# Altium PCB RFM22.PcbDoc
Units mil, origin at the board's own origin, x right, y up, seen from the top; angles counter-clockwise.
Board outline 1190 x 1895 mil, 2 copper layers (Top Layer, Bottom Layer); 34 components, 37 nets, 131 pads, 18 vias.
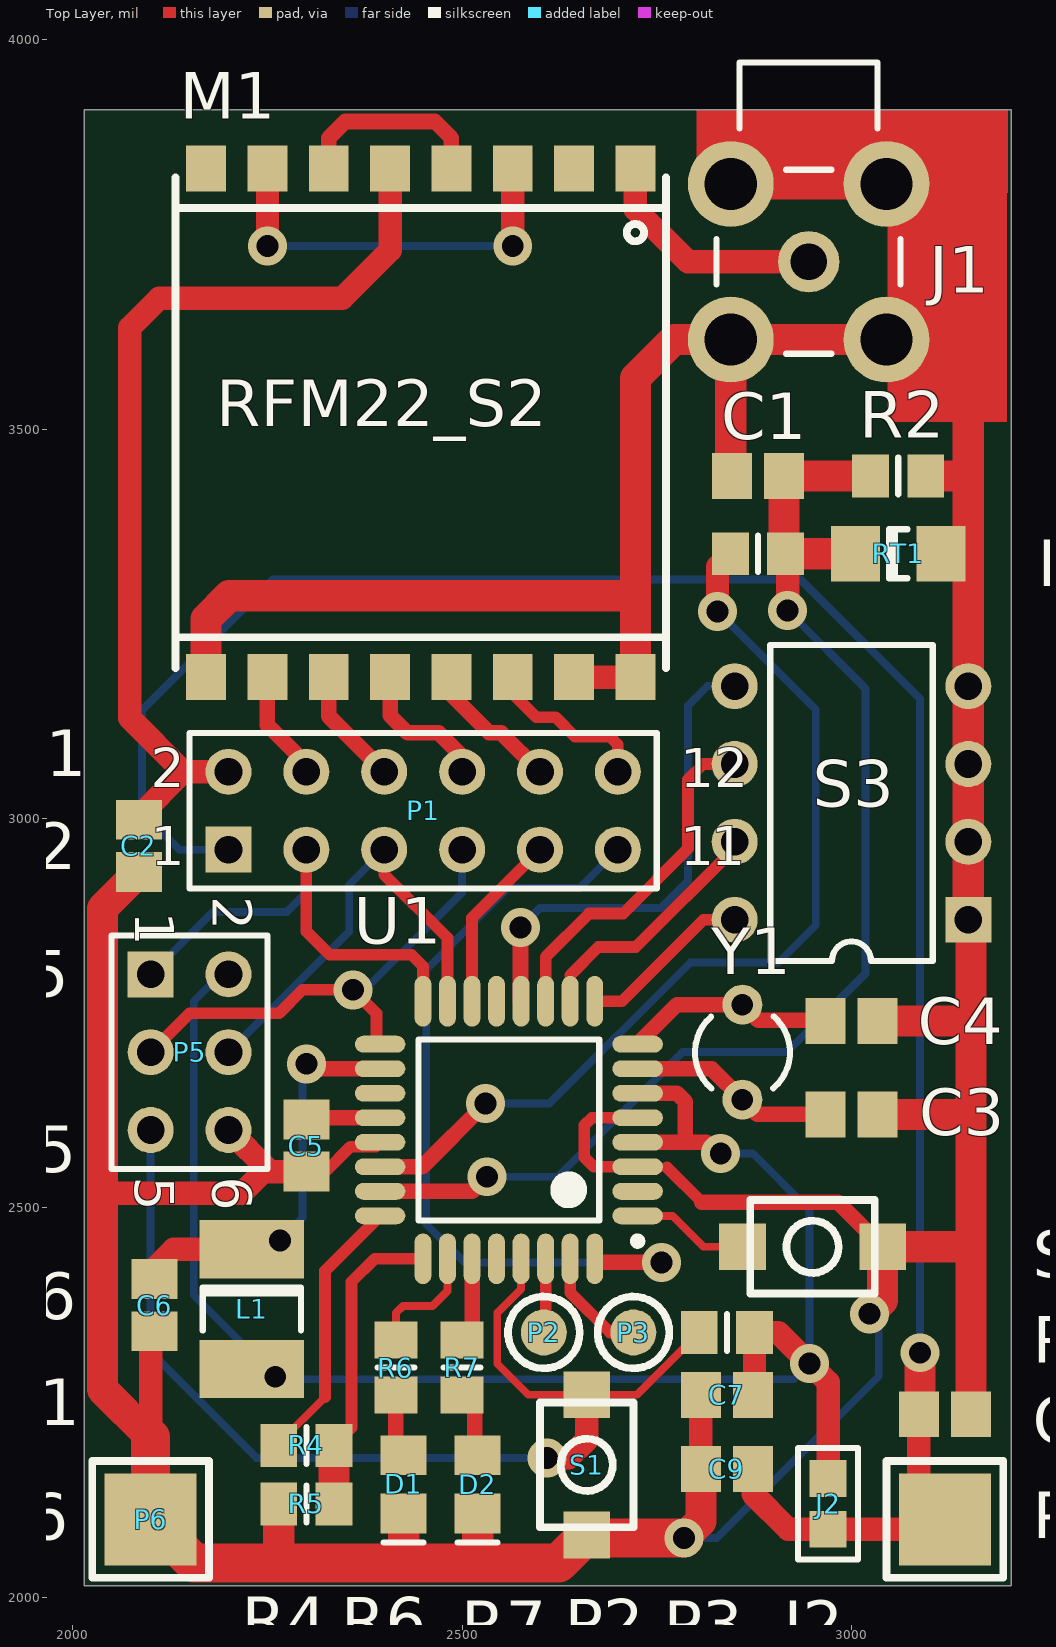
[diagram p0: Top Layer view]
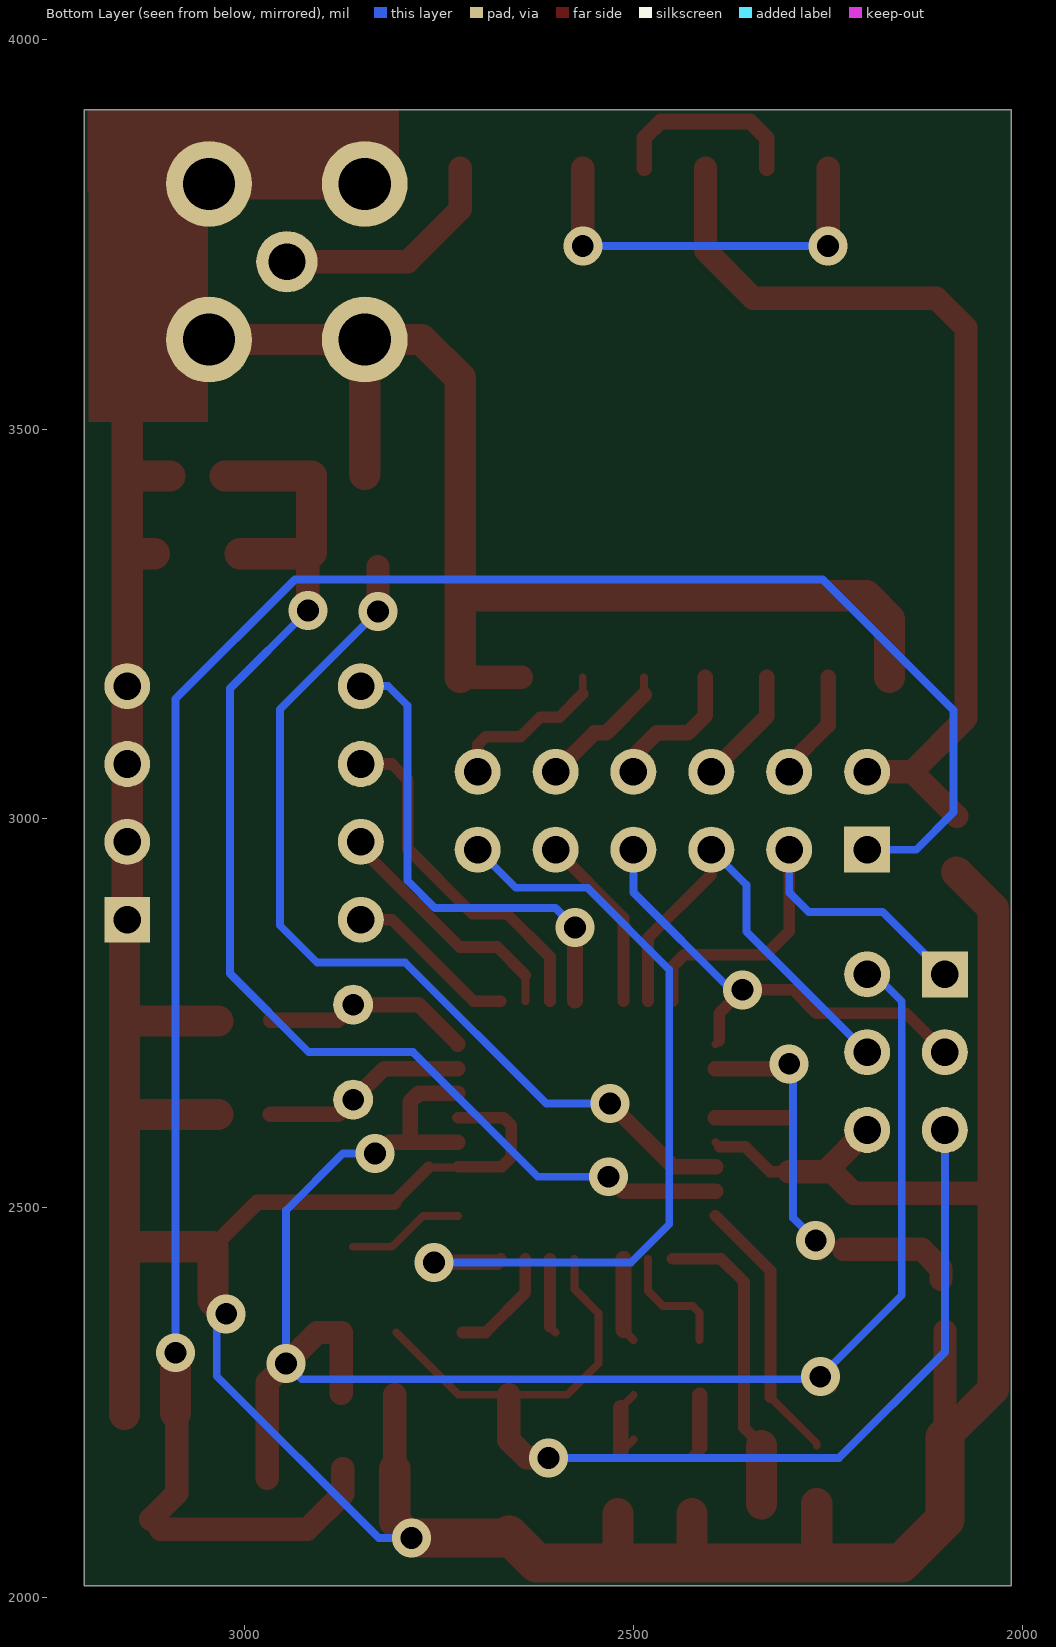
[diagram p1: Bottom Layer view, seen from below]

## Layer stack, top to bottom
Top Layer: signal copper 1.4
Dielectric: dielectric 12.6, FR-4, Dk 4.8
Bottom Layer: signal copper 1.4

## Board outline
2015,2015 3205,2015 3205,3910 2015,3910

## Design rules (kind name [scope] priority, off if disabled: settings)
Clearance [All] p1: gap=10
PolygonConnect [All] p1: connectstyle=Relief reliefconductorwidth=10 reliefentries=4 polygonreliefangle="90 Angle"
RoutingVias [All] p1: holewidth=28 width=50 viastyle="Through Hole" minholewidth=28 minwidth=50 maxholewidth=28 maxwidth=50
SilkscreenOverComponentPads [All] p1: minsilkscreentomaskgap=10
SolderMaskExpansion [All] p1: expansion=4
TestPointUsage FabricationTestPointUsage [All] p1: valid=0 allowmultiple=FALSE
Testpoint FabricationTestpoint [(IsPad And (OnTopLayer Or OnBottomLayer))] p1: side=3 testpointundercomponent=TRUE minsize=40 maxsize=100 preferedsize=60 minholesize=0 maxholesize=40 preferedholesize=32 testpointgrid=1 style=297 order=0-112345678
Width [All] p1: maxlimit=10 minlimit=10 preferedwidth=10
23 further rules are at their usual default settings.

## Components (designator, comment, footprint, x,y, rotation, side; value= is the part's Value field where it differs from the comment)
C1 "10 nF" C0805 2880,3440 r0 top
C2 "0.1 uF" C0805 2085,2965 r270 top
C3 "22 pF" C0805 3000,2620 r180 top
C4 "22 pF" C0805 3000,2740 r180 top
C5 "0.1 uF" C0805 2300,2580 r90 top
C6 "0.1 uF" C0805 2105,2375 r90 top
C7 "0.1 uF" C0805 2840,2260 r0 top
C8 "10 uF" C0805 3120,2235 r180 top
C9 "10 uF" C0805 2840,2165 r0 top
D1 "LED_SMD" LED-0805 2425,2145 r270 top
D2 "LED_SMD" LED-0805 2520,2145 r270 top
J1 "919-119J-51AX" 919-119J 2945,3715 r270 top
J2 "SMD jumper" "SMD jmp 2" 2970,2120 r270 top
L1 "10 mH" 1812 2230,2370 r270 top
M1 "RFM22" RFM22_S2 2722.48,3835 r270 top
P1 "Header 6X2" HDR2X6 2200,2960 r0 top
P2 "PAD1" PAD1 2605,2340 r0 top
P3 "PAD1" PAD1 2720,2340 r0 top
P4 "PAD_PWR" PAD_PWR 3120,2100 r0 top
P5 "Header 3X2" HDR2X3 2100,2800 r270 top
P6 "PAD_PWR" PAD_PWR 2100,2100 r0 top
R1 "10 K" R0805 2880,3340 r180 top
R2 "10 K" R0805 3060,3440 r0 top
R3 "10 K" R0805 2840,2340 r180 top
R4 "10 K" R0805 2300,2195 r180 top
R5 "10 K" R0805 2300,2120 r0 top
R6 "10 K" R0805 2415,2295 r270 top
R7 "10 K" R0805 2500,2295 r270 top
RT1 "NTC 10K" R1206 3060,3340 r0 top
S1 "SW-PB" SW_ts017a 2770,2240 r90 top
S2 "SW-PB" SW_ts017a 2880,2560 r180 top
S3 "SW DIP-4" DIP-8 3000,3020 r90 top
U1 "ATmega8L-8AC" 32A_N 2560,2600 r180 top
Y1 "XTAL" X32768_normal 2860,2700 r0 top

## Footprints (in the part's own frame and the unit in brackets; to place one, negate y for a bottom-side part, rotate by r counter-clockwise, add the part's x,y. Pads: shape width x height; smd on the part's side, far side on the other; paste and mask are expansions set on the pad)
32A_N [mm] "Thin QFP, 32-Leads, Body 7x7mm, Pitch 0.8mm, IPC Medium Density"
  oval 1.65x0.55 smd: 1(-4.2,2.8) 2(-4.2,2) 3(-4.2,1.2) 4(-4.2,0.4) 5(-4.2,-0.4) 6(-4.2,-1.2) 7(-4.2,-2) 8(-4.2,-2.8) 17(4.2,-2.8) 18(4.2,-2) 19(4.2,-1.2) 20(4.2,-0.4) 21(4.2,0.4) 22(4.2,1.2) 23(4.2,2) 24(4.2,2.8)
  oval 0.55x1.65 smd: 9(-2.8,-4.2) 10(-2,-4.2) 11(-1.2,-4.2) 12(-0.4,-4.2) 13(0.4,-4.2) 14(1.2,-4.2) 15(2,-4.2) 16(2.8,-4.2) 25(2.8,4.2) 26(2,4.2) 27(1.2,4.2) 28(0.4,4.2) 29(-0.4,4.2) 30(-1.2,4.2) 31(-2,4.2) 32(-2.8,4.2)
  silkscreen extent -4.33,-2.95 2.95,3.75, body extent -3.5,-3.5 3.5,3.5, height 1.2
919-119J [mm] "Connector; RF Coaxial, MCX, Thru-Hole; 5 Position; Right Angle"
  round 2 hole 1.2: 1(0,0)
  round 2.8 hole 1.7: 2(-2.54,-2.54) 3(2.54,-2.54) 4(2.54,2.54) 5(-2.54,2.54)
  silkscreen extent -6.5,-3 3,3
1812 [mm] "Chip; Body 4.5 x 3.2 mm (LxW typ)"
  rect 1.9x3.4 smd: 1(-1.95,0) 2(1.95,0)
  silkscreen extent -0.7,-1.6 0.7,1.6
C0805 [mm] "Chip Capacitor, Body 2.0x1.3mm, IPC Medium Density"
  rect 1.3x1.5 smd: 1(-0.85,0) 2(0.85,0)
  body extent -1.1,-0.72 1.1,0.72, height 1.1
DIP-8 [mm] "DIP; 8 Leads; Row Spacing 7.62 mm; Pitch 2.54 mm"
  rect 1.5x1.5 hole 0.9: 1(-3.81,-3.81)
  round 1.5 hole 0.9: 2(-1.27,-3.81) 3(1.27,-3.81) 4(3.81,-3.81) 5(3.81,3.81) 6(1.27,3.81) 7(-1.27,3.81) 8(-3.81,3.81)
  silkscreen extent -5.15,-2.65 5.15,2.65
HDR2X3 [mm] "Connector; Header; 3x2 Position"
  rect 1.5x1.5 hole 0.9: 1(0,0)
  round 1.5 hole 0.9: 2(0,2.54) 3(2.54,0) 4(2.54,2.54) 5(5.08,0) 6(5.08,2.54)
  silkscreen extent -1.27,-1.27 6.35,3.81
HDR2X6 [mm] "Connector; Header; 6x2 Position"
  rect 1.5x1.5 hole 0.9: 1(0,0)
  round 1.5 hole 0.9: 2(0,2.54) 3(2.54,0) 4(2.54,2.54) 5(5.08,0) 6(5.08,2.54) 7(7.62,0) 8(7.62,2.54) 9(10.16,0) 10(10.16,2.54) 11(12.7,0) 12(12.7,2.54)
  silkscreen extent -1.27,-1.27 13.97,3.81
LED-0805 [mm] "Chip Diode; Body 2.0 x 1.3 mm (LxW typ)"
  rect 1.3x1.5 smd: 1(-0.95,0) 2(0.95,0)
  silkscreen extent 1.9,-0.65 1.9,0.65
PAD1 [mm] "Connector"
  round 1.5 smd: 1(0,0)
  silkscreen extent -1.17,-1.17 1.17,1.17
PAD_PWR [mm] "Connector"
  rect 3x3 smd: 1(0,0)
  silkscreen extent -1.91,-1.91 1.91,1.91
R0805 [mm] "Chip Resistor, Body 2.0x1.3mm, IPC Medium Density"
  rect 1.2x1.4 smd: 1(-0.9,0) 2(0.9,0)
  silkscreen extent 0,-0.6 0,0.6, body extent -1.07,-0.7 1.07,0.7, height 0.65
R1206 [mm] "Chip Resistor; Body 3.2 x 1.6 mm (LxW typ)"
  rect 1.6x1.8 smd: 1(-1.4,0) 2(1.4,0)
  silkscreen extent -0.3,-0.8 0.3,0.8
RFM22_S2 [mm]
  rect 1.5x1.3 smd: 1(0,0) 2(0,-2) 3(0,-4) 4(0,-6) 5(0,-8) 6(0,-10) 7(0,-12) 8(0,-14) 9(16.6,-14) 10(16.6,-12) 11(16.6,-10) 12(16.6,-8) 13(16.6,-6) 14(16.6,-4) 15(16.6,-2) 16(16.6,0)
  silkscreen extent 0.3,-15 16.3,1
"SMD jmp 2" [mm]
  rect 1.2x1.2 smd: 1(-0.83,0) 2(0.83,0)
  silkscreen extent -1.82,-0.98 1.82,0.98
SW_ts017a [mil]
  rect 60x60 smd: 1(-160,110) 2(20,110)
  silkscreen extent -150,50 10,170
X32768_normal [mm] "Crystal, Thru-Hole; 2 Leads; Body 3.1 x 8.2 mm (Dia.xH)"
  round 1.3 hole 0.7: 1(0,1.55) 2(0,-1.55)
  silkscreen extent -1.55,-1.19 1.55,1.17

## Part data
C1 C2 C3 C4 C5 C6 C7 C8 C9: library part Cap, "Capacitor"
D1 D2: "Typical SMD LED"
J1: "MCX RF Coaxial PCB Connector, Thru-Hole, Right-Angle Mount Socket, Blunt Post Terminal, 50 Ohm Impedance"
L1: library part Inductor, "Inductor"
P1: "Header, 6-Pin, Dual row"
P2: library part PAD_PWR, "PAD connection"
P3 P4 P6: "PAD connection"
P5: "Header, 3-Pin, Dual row"
R1 R2 R3 R4 R5 R6 R7: library part Res1, "Resistor"
RT1: library part "Res Thermal", "Thermistor"
S1 S2: "Switch"
S3: "DIP Switch, 4 Position, SPST"
U1: "8-Bit AVR Microcontroller with 8K Bytes of In-System Programmable Flash Memory"
Y1: "Crystal Oscillator"

## Via types
v1: diameter 50, hole 28, Top Layer to Bottom Layer, 18 vias

## Nets (pads, with @x,y where several pads share a name; then routed paths per layer and width w, separated by ;. In a path a pad name is that pad's centre, name@x,y a point inside that pad or via, vN(x,y) a via of type N, cw(c..) or ccw(c..) an arc to the next point about the centre after c; other vN are vias at no path point)
GLED: R7.1 U1.27 | length 109.5
  Top Layer w10: R7.1 R7.1@2512.76,2343.19
  Top Layer w20: R7.1@2512.76,2343.19 U1.27
GND: C1.1 C2.2 C3.1 C4.1 C5.1 C6.1 C7.1 C8.1 C9.1 D1.2 D2.2 J1.2 J1.3 J1.4 J1.5 M1.9 M1.15 M1.16 P5.6 P6.1 R2.2 R5.1 RT1.2 S1.1 S2.1 S3.1 S3.2 S3.3 S3.4 U1.3 U1.5 U1.21 | length 7685.3
  Top Layer w10: 2038,2520 2039,2519 ; 2244.54,2546.54 2253.46,2546.54 ; U1.21@2388.98,2578.58 U1.21 ; 2520,2045 2521,2044 ; U1.3 2726.11,2552 2763,2552 ; C1.1@2845,3441.54 C1.1 ; C4.1 C4.1@3035.46,2738 ; S3.1 S3.1@3153.46,2866.54
  Top Layer w15: C5.1 2324.54,2546.54 2356.58,2578.58 U1.21@2388.98,2578.58 ; U1.3 2669.24,2552.76 2657,2565 2657,2606 2666.75,2615.75 U1.5 ; 2763,2552 2808,2507
  Top Layer w20: 2808,2507 2983,2507 S2.1
  Top Layer w30: 2039,2519 2217,2519 2244.54,2546.54 ; 2100,2205 C6.1@2100,2341.54 ; P5.6 2253.46,2546.54 C5.1 ; M1.15 M1.16 ; C9.1 C7.1
  Top Layer w40: C2.2 2038,2884.54 2038,2520 2038,2267 2100,2205 ; M1.9 2171.3,3256.3 2201,3286 2722.48,3286 ; 2264.57,2046.57 R5.1 ; 2425,2044 D1.2 ; 2520,2045 D2.2 ; M1.16 2722.48,3286 ; v1(2785,2076) 2806.54,2097.54 C9.1 ; C1.1@2845,3441.54 J1.3 ; J1.2 J1.5 3123,3815 3150,3788 3150,3615 ; v1(3023,2364) 3040,2381 S2.1 3153.46,2450 ; C3.1 3153.46,2620 ; C4.1 3153.46,2740 ; R2.2 3150,3440 ; RT1.2 3150,3340 ; S3.1 S3.2 S3.3 S3.4 3150,3340 ; C8.1 3153.46,2450 ; S3.1@3153.46,2866.54 3153.46,2740 ; 2722.48,3286 2722.48,3565.48 2772,3615 J1.3 ; J1.3 J1.4 3150,3615 ; 3150,3340 3150,3615 ; 3153.46,2450 3153.46,2620 ; 3153.46,2620 3153.46,2740
  Top Layer w50: 2100,2205 P6.1 2156,2044 2425,2044 2521,2044 2624,2044 S1.1 ; S1.1@2664,2076 v1(2785,2076)
  Bottom Layer w10: v1(2785,2076) 2827,2076 3035,2284 3035,2352 v1(3023,2364)
NetC1_2: C1.2 R1.1 R2.1 RT1.1 U1.23 | length 1618.4
  Top Layer w10: R1.1@2913.46,3341.97 R1.1
  Top Layer w20: U1.23 2513.26,2521.26 v1(2532,2540)
  Top Layer w30: v1(2918,3267) R1.1@2918,3337.43
  Top Layer w40: R1.1@2913.46,3341.97 C1.2 R2.1 ; R1.1 RT1.1
  Bottom Layer w10: v1(2532,2540) 2623,2540 2783,2700 2917,2700 3018,2801 3018,3167 v1(2918,3267)
NetC2_1: C2.1 M1.5 P1.2 | length 1222.9
  Top Layer w10: C2.1 C2.1@2085,3003
  Top Layer w30: C2.1@2085,3003 2142,3060 ; P1.2 2142,3060 ; M1.5 2407.52,3729.52 2346,3668 2111,3668 2073,3630 2073,3129 2142,3060
NetC3_2: C3.2 U1.7 Y1.2 | length 267
  Top Layer w10: C3.2@2965.51,2618.98 C3.2
  Top Layer w20: U1.7 2820.24,2678.74 Y1.2 2878.98,2620 C3.2
NetC4_2: C4.2 U1.8 Y1.1 | length 270.9
  Top Layer w10: C4.2@2965.51,2741.02 C4.2
  Top Layer w20: U1.8 2776.14,2761.02 Y1.1 2880,2741.02 C4.2@2965.51,2741.02
NetC5_2: C5.2 U1.20 | length 95.6
  Top Layer w10: C5.2 C5.2@2302.28,2615.75
  Top Layer w20: C5.2@2302.28,2615.75 U1.20
NetC6_2: C6.2 L1.1 U1.18 | length 501.6
  Top Layer w10: L1.1@2249.77,2447 L1.1@2260,2436.77 ; v1(2300,2685) v1@2306.26,2678.74
  Top Layer w20: v1@2306.26,2678.74 U1.18
  Top Layer w30: C6.2 2105,2422 2129.77,2446.77 L1.1
  Bottom Layer w10: v1(2266,2458) 2295,2487 2295,2680 v1(2300,2685)
NetD1_1: D1.1 R6.2 | length 88.4
  Top Layer w10: D1.1@2415,2192.4 D1.1 D1.1@2420,2187.4
  Top Layer w20: D1.1@2415,2192.4 R6.2
NetD2_1: D2.1 R7.2 | length 113.7
  Top Layer w10: D2.1@2500,2202.4 D2.1 D2.1@2516.2,2186.2 ; R7.2 R7.2@2516.2,2243.37
  Top Layer w20: D2.1@2516.2,2186.2 R7.2@2516.2,2243.37
NetJ1_1: J1.1 M1.1 | length 303
  Top Layer w30: M1.1 2722.48,3782.52 2790,3715 J1.1
NetM1_3: M1.3 M1.7 | length 515
  Top Layer w30: v1(2250,3735) M1.7 ; v1(2565,3735) M1.3
  Bottom Layer w10: v1(2250,3735) v1(2565,3735)
NetM1_4: M1.4 M1.6 | length 252.6
  Top Layer w20: M1.6 2328.78,3873.78 2350,3895 2465,3895 2486.26,3873.74 M1.4
NetM1_10: M1.10 P1.4 | length 142.2
  Top Layer w10: P1.4 P1.4@2300,3070
  Top Layer w20: M1.10 2250.04,3119.96 P1.4@2300,3070
NetM1_11: M1.11 P1.6 | length 151
  Top Layer w20: M1.11 2328.78,3131.22 P1.6
NetM1_12: M1.12 P1.8 | length 183.2
  Top Layer w10: P1.8 P1.8@2500,3080
  Top Layer w20: M1.12 2407.52,3132.48 2430,3110 2470,3110 P1.8@2500,3080
NetM1_13: M1.13 P1.10 | length 177.4
  Top Layer w10: M1.13@2486.26,3158.74 M1.13
  Top Layer w20: M1.13@2486.26,3158.74 2535,3110 2550,3110 P1.10
NetM1_14: M1.14 P1.12 | length 218.4
  Top Layer w10: M1.14@2565,3160 M1.14
  Top Layer w15: M1.14@2565,3160 2595,3130 2620,3130 2645,3105 2690,3105 2700,3095 P1.12
NetP2_1: P2.1 U1.30 | length 97.6
  Top Layer w10: P2.1@2600,2340 P2.1@2607.24,2347.24
  Top Layer w15: P2.1@2607.24,2347.24 U1.30
NetP3_1: P3.1 U1.31 | length 145.9
  Top Layer w15: U1.31 2638.74,2391.26 2690,2340 P3.1
NetR1_2: R1.2 U1.22 | length 1200.5
  Top Layer w20: U1.22 2448.76,2552.76 v1(2530,2634)
  Top Layer w30: v1(2828,3266) R1.2@2828,3323.43
  Bottom Layer w10: v1(2530,2634) 2612,2634 2793,2815 2906,2815 2954,2863 2954,3140 v1(2828,3266)
NetR4_1: R4.1 R5.2 U1.25 | length 398.4
  Top Layer w15: R4.1 2358,2217.57 2358,2405 2387.65,2434.65 U1.25
  Top Layer w40: R5.2 R4.1
NetR4_2: R4.2 U1.24 | length 352.5
  Top Layer w10: R4.2 2264.57,2197.57 2324,2257 ; U1.24@2390.76,2489.76 U1.24
  Top Layer w15: 2324,2257 2324,2419.12 U1.24
NetS2_2: S2.2 U1.1 | length 151.1
  Top Layer w10: U1.1 2770.24,2489.76 2810,2450 S2.2
NIRQ: P1.11 U1.32 | length 1046.8
  Top Layer w15: U1.32 U1.32@2674.88,2430
  Top Layer w20: U1.32@2674.88,2430 v1(2756,2430)
  Bottom Layer w10: P1.11 2651,2911 2559,2911 2454,2806 2454,2479 2503,2430 v1(2756,2430)
NSEL: P1.9 U1.14 | length 230.8
  Top Layer w15: U1.14 2512.76,2872.76 P1.9
PB0: S3.5 U1.12 | length 630.2
  Top Layer w10: U1.12@2575,2766.1 U1.12
  Top Layer w20: U1.12@2575,2766.1 v1(2575,2860)
  Bottom Layer w10: v1(2575,2860) 2600,2885 2755,2885 2790,2920 2790,3145 2815,3170 S3.5
PD5: S3.8 U1.9 | length 223.1
  Top Layer w15: U1.9 2705.35,2765.35 2810,2870 S3.8
PD6: S3.7 U1.10 | length 320.3
  Top Layer w10: U1.10 2638.74,2798.74
  Top Layer w15: 2638.74,2798.74 2675,2835 2723,2835 2850,2962 S3.7
PD7: S3.6 U1.11 | length 454.4
  Top Layer w15: U1.11 2607.24,2822.24 2663,2878 2707,2878 2790,2961 2790,3050 2810,3070 S3.6
RLED: R6.1 U1.26 | length 153.9
  Top Layer w10: R6.1 2415,2365 2424,2374 2462,2374 2481.26,2393.26 U1.26
RST: P5.5 R3.2 S1.2 U1.29 | length 1439.7
  Top Layer w10: U1.29 2575.75,2395.75 2545,2365 2545,2300 2585,2260 S1.2 2724.57,2260 R3.2 ; S1.2@2650,2250 S1.2@2660,2240
  Top Layer w30: v1(2609,2179) 2637,2179 2660,2202 S1.2
  Bottom Layer w10: P5.5 2100,2315 2236,2179 v1(2609,2179)
SCK: P1.7 P5.3 U1.17 | length 624
  Top Layer w10: U1.17@2390,2714.88 U1.17
  Top Layer w15: P5.3 2150,2750 2265,2750 2295,2780 v1(2360,2780) 2390,2750 U1.17@2390,2714.88
  Bottom Layer w10: v1(2360,2780) 2375,2780 2500,2905 P1.7
SDI: P1.5 P5.4 U1.15 | length 571.1
  Top Layer w15: P1.5 2400,2928 2481.26,2846.74 U1.15
  Bottom Layer w10: P5.4 2355,2855 2355,2915 P1.5
SDO: P1.3 P5.1 U1.16 | length 616.7
  Top Layer w15: P1.3 2300,2855 2330,2825 2435,2825 2449.76,2810.24 U1.16
  Bottom Layer w10: P5.1 2180,2880 2275,2880 2300,2905 P1.3
V+: C7.2 J2.1 L1.2 P5.2 R3.1 U1.4 U1.6 | length 2234.8
  Top Layer w10: L1.2@2244.57,2267.8 v1(2260,2283.23) ; L1.2@2249.57,2272.8 v1(2260,2283.23) ; L1.2@2260,2293.23 v1(2260,2283.23) ; v1@2813.75,2584.25 v1@2828,2570 ; C7.2 C7.2@2875.43,2261.97
  Top Layer w15: v1@2820,2562 2828,2570 v1(2832,2570)
  Top Layer w20: U1.4 2786.75,2584.25 ; U1.6 2775.76,2647.24 2786.75,2636.25 2786.75,2584.25 ; v1@2813.75,2584.25 2786.75,2584.25
  Top Layer w30: C7.2@2875.43,2261.97 R3.1 2906,2340 v1(2946,2300) 2970,2276 J2.1
  Bottom Layer w10: P5.2 2190,2800 2155.47,2765.47 2155.47,2387.76 v1(2260,2283.23) 2263.23,2280 2926,2280 v1(2946,2300) 2946,2497 2873,2570 v1(2832,2570)
VCC: C8.2 C9.2 J2.2 P1.1 P4.1 | length 2765
  Top Layer w10: C8.2 C8.2@3088,2236.46 ; P4.1@3107.32,2087.32 P4.1
  Top Layer w30: C9.2 2873.46,2132.54 2918.68,2087.32 J2.2 P4.1@3107.32,2087.32 ; C8.2 3086.54,2133.46 P4.1
  Top Layer w40: C8.2@3088,2236.46 v1(3088,2314)
  Bottom Layer w10: P1.1 2137,2960 2089,3008 2089,3139 2257,3307 2934.57,3307 3088,3153.57 v1(3088,2314)
pads on no net: M1.2 M1.8 U1.2 U1.13 U1.19 U1.28

## Other copper
Top Layer:
  rectangle net GND: 3046,3509 3200,3909
  rectangle net GND: 2801,3803 3201,3910

## Silkscreen, mask and mechanical layers (free items; w line width, h text height)
Mechanical 1:
  lines w10: 2015,2015 2015,3915 3205,3915 3205,2015 3030,2015 2015,2015

## Text inside footprints (layer, text, board x,y; h text height)
M1: Top Overlay "RFM22_S2" at 2184,3504 h60
P1: Top Overlay "2" at 2100,3040 h50; Top Overlay "1" at 2100,2940 h50; Top Overlay "1" at 2780,2940 h50; Top Overlay "1" at 2820,2940 h50; Top Overlay "12" at 2780,3040 h50
P5: Top Overlay "1" at 2080,2880 h50 r270; Top Overlay "2" at 2180,2900 h50 r270; Top Overlay "5" at 2080,2540 h50 r270; Top Overlay "6" at 2180,2540 h50 r270